# Altium PCB SENSOR.PcbDoc
Units mm, origin at the board's own origin, x right, y up, seen from the top; angles counter-clockwise.
Board outline 30 x 30 mm, 2 copper layers (Top Layer, Bottom Layer); 30 components, 18 nets, 88 pads, 0 vias.
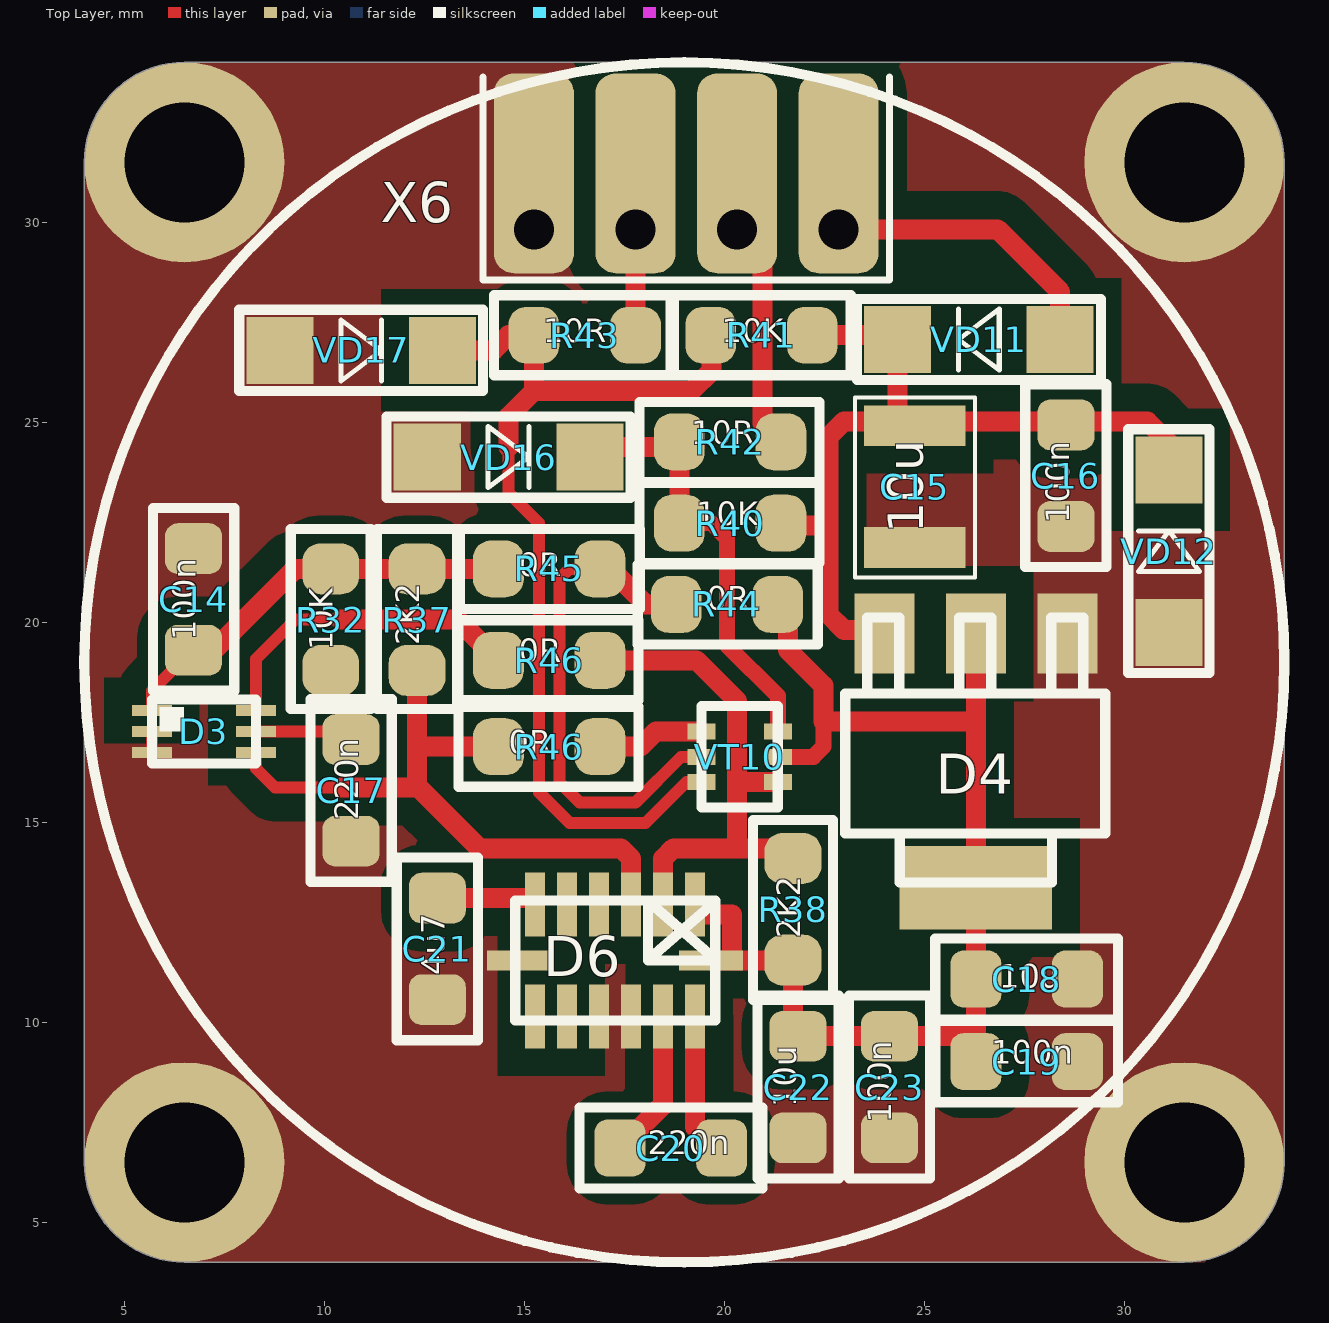
[diagram p0: Top Layer view]
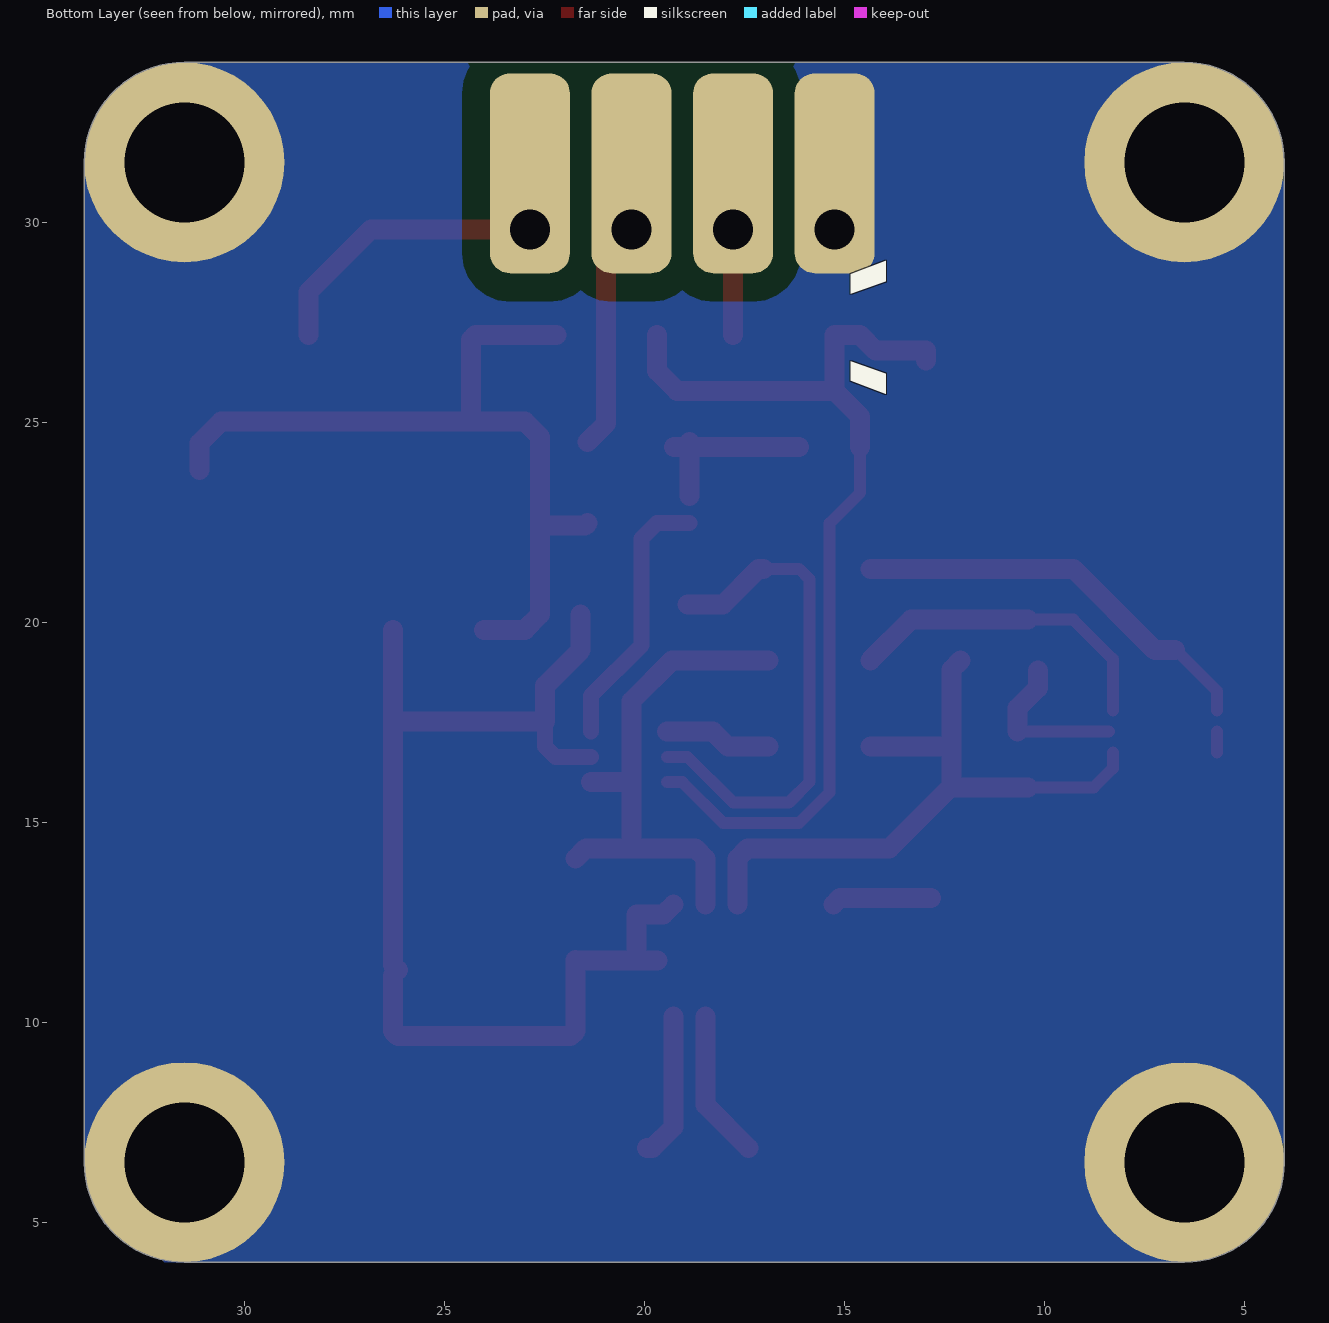
[diagram p1: Bottom Layer view, seen from below]
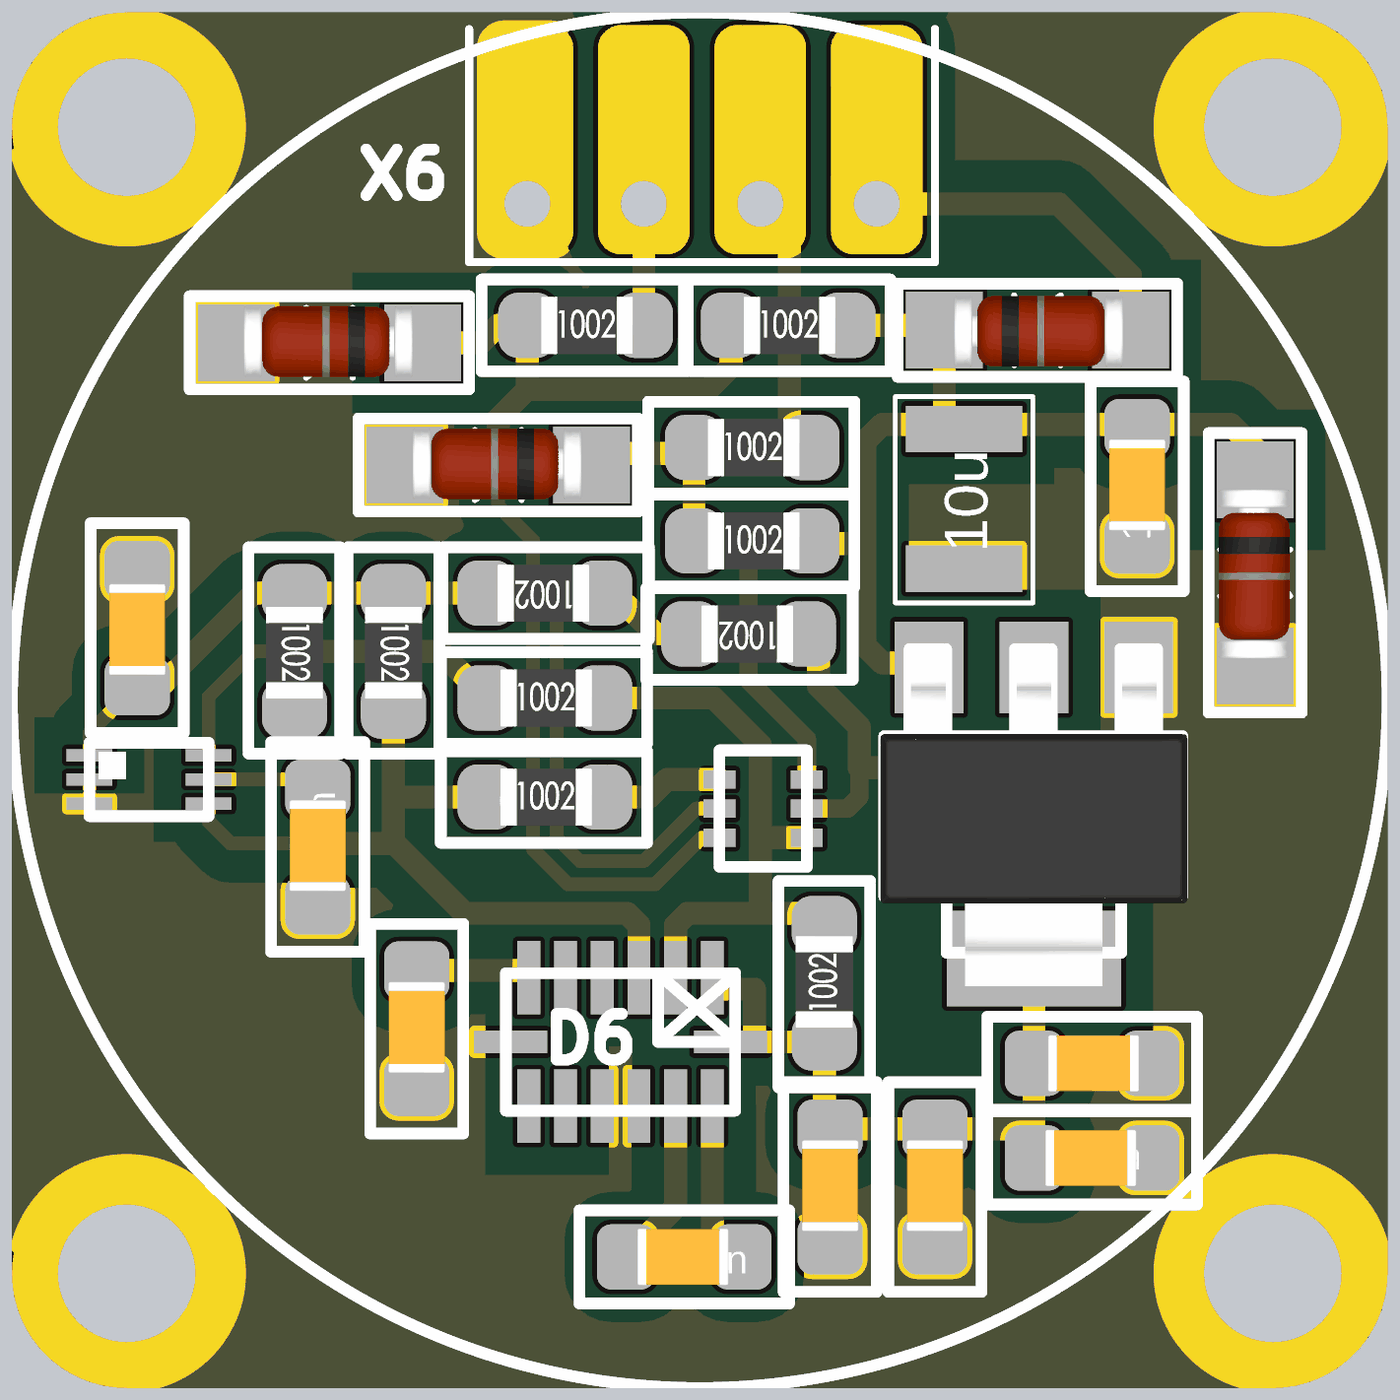
[diagram p2: 3D render of the assembled board from above, using the file's embedded part models]

## Layer stack, top to bottom
Top Solder: solder mask 0.0102, Solder Resist, Dk 3.5
Top Layer: signal copper 0.0356
Dielectric 1: dielectric 0.32, FR-4, Dk 4.8
Bottom Layer: signal copper 0.0356
Bottom Solder: solder mask 0.0102, Solder Resist, Dk 3.5

## Board outline
6.5,4 cw(c6.5,6.5) 4,6.5 4,31.5 cw(c6.5,31.5) 6.5,34 31.5,34 cw(c31.5,31.5) 34,31.5 34,6.5 cw(c31.5,6.5) 31.5,4

## Design rules (kind name [scope] priority, off if disabled: settings)
Clearance [All] p1: gap=0 ignorepadtopadclearanceinfootprint=TRUE except(0.7: Arc-Fill Arc-Poly Arc-Region Track-Fill Track-Poly Track-Region SMDPad-Fill SMDPad-Poly SMDPad-Region THPad-Fill THPad-Poly THPad-Region Via-Fill Via-Poly Via-Region Fill-Fill Fill-Poly Fill-Region Fill-Hole Poly-Poly Poly-Region Poly-Hole Region-Region Region-Hole)
PolygonConnect [All] p1: connectstyle=Direct reliefconductorwidth=0.254 reliefentries=4 polygonreliefangle="90 Angle" airgapwidth=0.254
RoutingVias [All] p1: holewidth=0.711 width=1.27 viastyle="Through Hole" minholewidth=0.711 minwidth=1.27 maxholewidth=0.711 maxwidth=1.27
SolderMaskExpansion [All] p1: expansion=0.102
Width [All] p1: maxlimit=1 minlimit=0.3 preferedwidth=0.5 minimp=50.000000 maximp=50.000000 favimp=50.000000
30 further rules are at their usual default settings.

## Components (designator, comment, footprint, x,y, rotation, side; value= is the part's Value field where it differs from the comment)
C14 "100n" RC0805_THRU_C 6.731,21.844 r270 top value=GRM21BR71H104KA01
C15 "10u" 1210T 24.765,21.869 r90 top value=GRM32DR71E106KA12L
C16 "100n" RC0805_THRU_C 28.54,22.396 r90 top value=GRM21BR71H104KA01
C17 "220n" RC0805_THRU_C 10.668,14.529 r90 top value=GRM21BR71H224KA01
C18 "10u" RC0805_THRU_C 26.289,11.081 r0 top value=GRM219R61E106KA12D
C19 "100n" RC0805_THRU_C 28.829,9.017 r180 top value=GRM21BR71H104KA01
C20 "220n" RC0805_THRU_C 19.933,6.858 r180 top value=GRM21BR71H224KA01
C21 "4u7" RC0805_THRU_C 12.827,10.566 r90 top value=GRM219R61E475KA12D
C22 "10u" RC0805_THRU_C 21.844,7.112 r90 top value=GRM219R61E106KA12D
C23 "100n" RC0805_THRU_C 24.13,7.112 r90 top value=GRM21BR71H104KA01
D3 "BH1750FVI" 6P_SMD 5.688,17.272 r0 top
D4 "LD1117" SOT223 26.289,19.717 r180 top value=LD1117S33TR
D6 "LSM303" LGA-14 15.272,11.547 r0 top value=LSM303DLHC
R32 "10K" RC0805_THRU 10.16,21.336 r270 top value=0805WAJ0103T10
R37 "2K2" RC0805_THRU 12.319,21.336 r270 top value=0805WAJ0222T10
R38 "2K2" RC0805_THRU 21.717,11.557 r90 top value=0805WAJ0222T10
R40 "10K" RC0805_THRU 18.875,22.479 r0 top value=0805WAJ0103T10
R41 "10K" RC0805_THRU 19.659,27.178 r0 top value=0805WAJ0103T10
R42 "10R" RC0805_THRU 18.875,24.512 r0 top value=0805WAJ0100T10
R43 "10R" RC0805_THRU 15.24,27.178 r0 top value=0805WAJ0100T10
R44 "0R" RC0805_THRU 21.336,20.447 r180 top value=0805WAJ0000T10
R45 "0R" RC0805_THRU 16.891,21.336 r180 top value=0805WAJ0000T10
R46 "0R" RC0805_THRU 14.351,16.891 r0 top value=0805WAJ0000T10
R46 "0R" RC0805_THRU 14.351,19.05 r0 top value=0805WAJ0000T10
VD11 "LL4148" SMD4148 28.397,27.07 r180 top value=LL4148-GS08
VD12 "BZV55" SMD4148 31.115,19.747 r90 top value=BZV55-C18.115
VD16 "BZV55" SMD4148 12.573,24.13 r0 top value=BZV55-C18.115
VD17 "BZV55" SMD4148 8.89,26.797 r0 top value=BZV55-C18.115
VT10 "NTZD3155C" SOT-363 19.431,17.272 r270 top value=NTJD5121NT1G
X6 "JMP4" CONN_SENSOR 22.86,29.826 r180 top

## Footprints (in the part's own frame and the unit in brackets; to place one, negate y for a bottom-side part, rotate by r counter-clockwise, add the part's x,y. Pads: shape width x height; smd on the part's side, far side on the other; paste and mask are expansions set on the pad)
6P_SMD [mm]
  rect 1x0.27 smd: 1(0,0.525) 2(0,0) 3(0,-0.525) 4(2.6,-0.525) 5(2.6,0) 6(2.6,0.525)
  silkscreen extent 0,-0.8 2.6,0.8
1210T [mil]
  rect 40x100 smd: 1(0,0) 2(120,0)
  silkscreen extent -29,-59 148,59
CONN_SENSOR [mm]
  rrect50% 2x5 hole 1 copper offset 0,-1.4: 1(0,0) 2(2.54,0) 3(5.08,0) 4(7.62,0)
  silkscreen extent -1.27,-3.81 8.89,1.27
LGA-14 [mm]
  rect 0.5x1.6 smd: 1(4,1.4) 2(3.2,1.4) 3(2.4,1.4) 4(1.6,1.4) 5(0.8,1.4) 6(0,1.4) 8(0,-1.4) 9(0.8,-1.4) 10(1.6,-1.4) 11(2.4,-1.4) 12(3.2,-1.4) 13(4,-1.4)
  rect 1.6x0.5 smd: 7(-0.4,0) 14(4.4,0)
  silkscreen extent -0.5,-1.5 4.5,1.5
RC0805_THRU [mil]
  rrect70% 50x56 smd: 1(0,0) 2(100,0)
  silkscreen extent -39,-39 138,39, body extent 12,-25 91,25, height 20
RC0805_THRU_C [mil]
  rrect50% 50x56 smd: 1(0,0) 2(100,0)
  silkscreen extent -40,-40 140,40, body extent 12,-25 91,25, height 24
SMD4148 [mil]
  rect 66x66 smd: 1(0,0) 2(160,0)
  silkscreen extent -40,-40 200,40, body extent 6,-30 152,32, height 63
SOT223 [mm]
  rect 1.5x2 smd: 1(-2.286,0) 2(0,0) 3(2.286,0)
  rect 3.81x2.083 smd: 4(0,6.35)
  silkscreen extent -3.24,-0.4 3.26,6.22, body extent -3.35,-0.35 3.35,6.95, height 1.8
SOT-363 [mm]
  rect 0.4x0.7 smd: 1(0,0) 2(0.635,0) 3(1.27,0) 4(1.27,1.905) 5(0.635,1.905) 6(0,1.905)
  silkscreen extent -0.63,0 1.9,1.91

## Part data
C14 C16 C17 C19 C20 C21 C22 C23: library part C0805THRU, Title=Конденсатор
  C14 C16 C19 C23: Exec=C, Price=000000,55, val=100n
  C17 C20: Exec={Exec}, Price=000000,55, val=220n
  C21: Exec={Exec}, Price=000000,55, val=4u7
  C22: Exec=C, Price=000002,00, val=10u
C15: library part CC1210, Exec={Exec}, Price=000003,00, Title=Конденсатор, val=10u
C18: library part C0805THRU_VARIANT_2, Price=000002,00, Title=Конденсатор, val=10u
R32 R37 R38 R40 R41 R42 R43 R44 R45 R46 R46: library part R0805THRU, =Резистор, Exec={Exec}, Note=ROYALOHM, Price=000000,05
  R32 R40 R41: val=10K
  R37 R38: val=2K2
  R42 R43: val=10R
  R44 R45 R46: val=0R
X6: library part CONN_SENSOR
D3: =Микросхема, Exec={Exec}, Price=000045,00
D4: =Микросхема, Exec={Exec}, Price=000005,00
D6: =Микросхема, Exec={Exec}, Price=000095,00
VD11: =Диод, Exec={Exec}, Price=000000,40
VD12: Exec={Exec}, Price=000001,00, Title=Стабилитрон
VD16 VD17: Exec={Exec}, Note={Note}, Price=000001,00, Title=Стабилитрон
VT10: =Транзистор, Price=000005,00

## Free pads (board coordinates)
  round 5 hole 3: 2(6.5,6.5) 2(6.5,31.5) 2(31.5,6.5) 2(31.5,31.5)

## Nets (pads, with @x,y where several pads share a name; then routed paths per layer and width w, separated by ;. In a path a pad name is that pad's centre, name@x,y a point inside that pad or via, vN(x,y) a via of type N, cw(c..) or ccw(c..) an arc to the next point about the centre after c; other vN are vias at no path point)
NetC14_1: C14.1 C15.1 C16.1 C17.1 C18.2 C19.1 C21.1 C22.1 C23.1 D3.2 D3.3 D4.1 D6.7 D6.10 D6.11 pad.2 VD12.1 VD16.1 VD17.1 X6.4 | length 0.5
  Top Layer w0.3: D3.3 D3.2
NetC14_2: C14.2 D3.1 R32.1 R37.1 R45.2 | length 10.5
  Top Layer w0.3: D3.1 5.688,18.288 6.731,19.331 C14.2
  Top Layer w0.5: C14.2 7.239,19.304 9.271,21.336 R32.1 R37.1 R45.2
NetC15_2: C15.2 C16.2 D4.3 R40.2 R41.2 VD11.2 VD12.2 | length 21
  Top Layer w0.5: R40.2 21.479,22.415 22.606,22.415 ; R41.2 24.225,27.178 VD11.2 C15.2@24.333,25.019 ; D4.3@24.003,19.812 22.987,19.812 22.606,20.193 22.606,22.415 ; VD12.2 31.115,24.482 30.578,25.019 C15.2@24.333,25.019 ; 22.606,22.415 22.606,24.638 22.987,25.019 C15.2@24.333,25.019
NetC17_2: C17.2 D3.5 R32.2 | length 4
  Top Layer w0.3: D3.5@8.382,17.272 C17.2@10.668,17.272
  Top Layer w0.5: R32.2 10.16,18.362 10.668,17.854 C17.2@10.668,17.272
NetC18_1: C18.1 C19.2 C22.2 C23.2 D4.2 D6.1 D6.14 R38.1 R44.1 VT10.5 | length 29.4
  Top Layer w0.4: VT10.5 22.225,16.637 22.479,16.891 22.479,17.526
  Top Layer w0.5: D6.1 19.519,12.7 20.193,12.7 D6.14@20.193,11.547 ; D6.14 D6.14@20.193,11.547 ; R44.1@21.59,20.193 21.59,19.304 22.479,18.415 22.479,17.526 26.289,17.526 ; C18.1@26.162,11.303 26.289,11.43 26.289,17.526 ; C18.1@26.289,11.176 C18.1 26.289,9.779 26.162,9.652 C23.2 C22.2 21.717,9.779 R38.1 21.707,11.547 D6.14@20.193,11.547 ; D4.2@26.289,19.812 D4.2 26.289,17.526
NetC20_1: C20.1 D6.13 | length 3.6
  Top Layer w0.5: D6.13 19.272,7.385 19.799,6.858 C20.1
NetC20_2: C20.2 D6.12 | length 3.7
  Top Layer w0.5: C20.2 18.472,7.937 D6.12
NetC21_2: C21.2 D6.6 | length 2.5
  Top Layer w0.5: C21.2 15.113,13.106 D6.6
NetD3_4: D3.4 D6.3 R37.2 R46.1@14.351,16.891 | length 17.2
  Top Layer w0.3: D3.4 8.288,16.35 8.763,15.875 10.414,15.875
  Top Layer w0.5: 10.414,15.875 12.319,15.875 ; R37.2@12.09,19.05 12.319,18.821 R37.2 12.319,17 ; R46.1@14.351,16.891 12.428,16.891 12.319,17 ; D6.3 17.672,14.097 17.418,14.351 13.872,14.351 12.348,15.875 12.319,15.875 ; 12.319,15.875 12.319,17
NetD3_6: D3.6 R46.1@14.351,19.05 | length 8.2
  Top Layer w0.3: D3.6 8.288,19.078 9.276,20.066 10.414,20.066
  Top Layer w0.5: 10.414,20.066 13.335,20.066 R46.1@14.351,19.05
NetD6_2: D6.2 R38.2 R46.2@16.891,19.05 VT10.4 | length 13.2
  Top Layer w0.5: R46.2@16.891,19.05 19.304,19.05 20.32,18.034 20.32,16.002 ; D6.2 18.472,14.097 18.726,14.351 20.32,14.351 ; VT10.4 20.32,16.002 ; R38.2 21.463,14.351 20.32,14.351 ; 20.32,14.351 20.32,16.002
NetR40_1: R40.1 R42.1 VD16.2 VT10.6 | length 11.2
  Top Layer w0.4: R40.1 19.685,22.479 20.066,22.098 20.066,19.431 21.336,18.161 VT10.6
  Top Layer w0.5: VD16.2@16.129,24.384 R42.1@18.875,24.384 ; R40.1@18.875,23.162 R42.1@18.875,24.384 ; R42.1 R42.1@18.875,24.384 ; R42.1@19.253,24.384 R42.1@18.875,24.384
NetR41_1: R41.1 R43.1 VD17.2 VT10.3 | length 25.1
  Top Layer w0.3: 14.605,24.384 14.605,23.241 15.367,22.479 15.367,15.748 16.129,14.986 18.034,14.986 19.05,16.002 VT10.3
  Top Layer w0.5: VD17.2@12.954,26.543 VD17.2 14.224,26.797 14.605,27.178 R43.1 15.24,25.781 ; 14.605,24.384 14.605,25.146 15.24,25.781 ; R41.1@19.685,27.178 19.685,26.289 19.177,25.781 15.24,25.781
NetR42_2: R42.2 X6.2 | length 5.8
  Top Layer w0.5: X6.2 20.955,29.191 20.955,24.972 R42.2
NetR43_2: R43.2 X6.3 | length 2.6
  Top Layer w0.5: R43.2 X6.3
NetR44_2: R44.2 R45.1 VT10.2 | length 12.8
  Top Layer w0.3: R45.1@17.018,21.336 R45.1 16.129,21.336 15.875,21.082 15.875,16.002 16.383,15.494 17.78,15.494 18.923,16.637 VT10.2
  Top Layer w0.5: R45.1@17.018,21.336 17.145,21.336 18.034,20.447 R44.2@18.923,20.447
NetR46_2: R46.2@16.891,16.891 VT10.1 | length 2.7
  Top Layer w0.5: R46.2@16.891,16.891 17.907,16.891 18.288,17.272 VT10.1
NetVD11_1: VD11.1 X6.1 | length 6.6
  Top Layer w0.5: X6.1@23.495,29.826 26.833,29.826 28.397,28.262 VD11.1@28.397,27.178
pads on no net: D4.4 D6.4 D6.5 D6.8 D6.9

## Polygon pours and split planes (outlines as drawn)
NetC14_1 on Top Layer "Top Layer-SENS.GND" (solid, remove dead copper, pour order 0): 31.5,34 6.5,34 4,31 4,7 6.5,4 32,4 34,6.5 34,31.5
NetC14_1 on Bottom Layer "Top Layer-SENS.GND" (solid, remove dead copper, pour order 4): 31.5,34 6.5,34 4,31 4,7 6.5,4 32,4 34,6.5 34,31.5

## Silkscreen, mask and mechanical layers (free items; w line width, h text height)
Top Overlay:
  circle w0.254: c19,19 r15
Bottom Overlay:
  region: 74.168,18.796
  region: 234.315,192.786
  text "A" at 9.779,29.083 h22 r270
Bottom Solder:
  lines w0.254: 4,6.5 ccw(c6.5,6.5) 6.5,4 ; 4,31.5 cw(c6.5,31.5) 6.5,34 ; 31.5,4 ccw(c31.5,6.5) 34,6.5 ; 31.5,34 cw(c31.5,31.5) 34,31.5
Mechanical 1:
  lines w0.254: 4,6.5 4,31.5 ; 6.5,4 31.5,4 ; 6.5,34 31.5,34 ; 34,6.5 34,31.5